# Altium PCB 400631.PcbDoc (part 7 of 8)
Units mm, origin at the board's own origin, x right, y up, seen from the top; angles counter-clockwise.
Board outline 136.53 x 63.5 mm, 4 copper layers (Top Layer, Mid-Layer 1, Mid-Layer 2, Bottom Layer), stack 1.52 mm thick; 366 components, 256 nets, 1485 pads, 1968 vias.
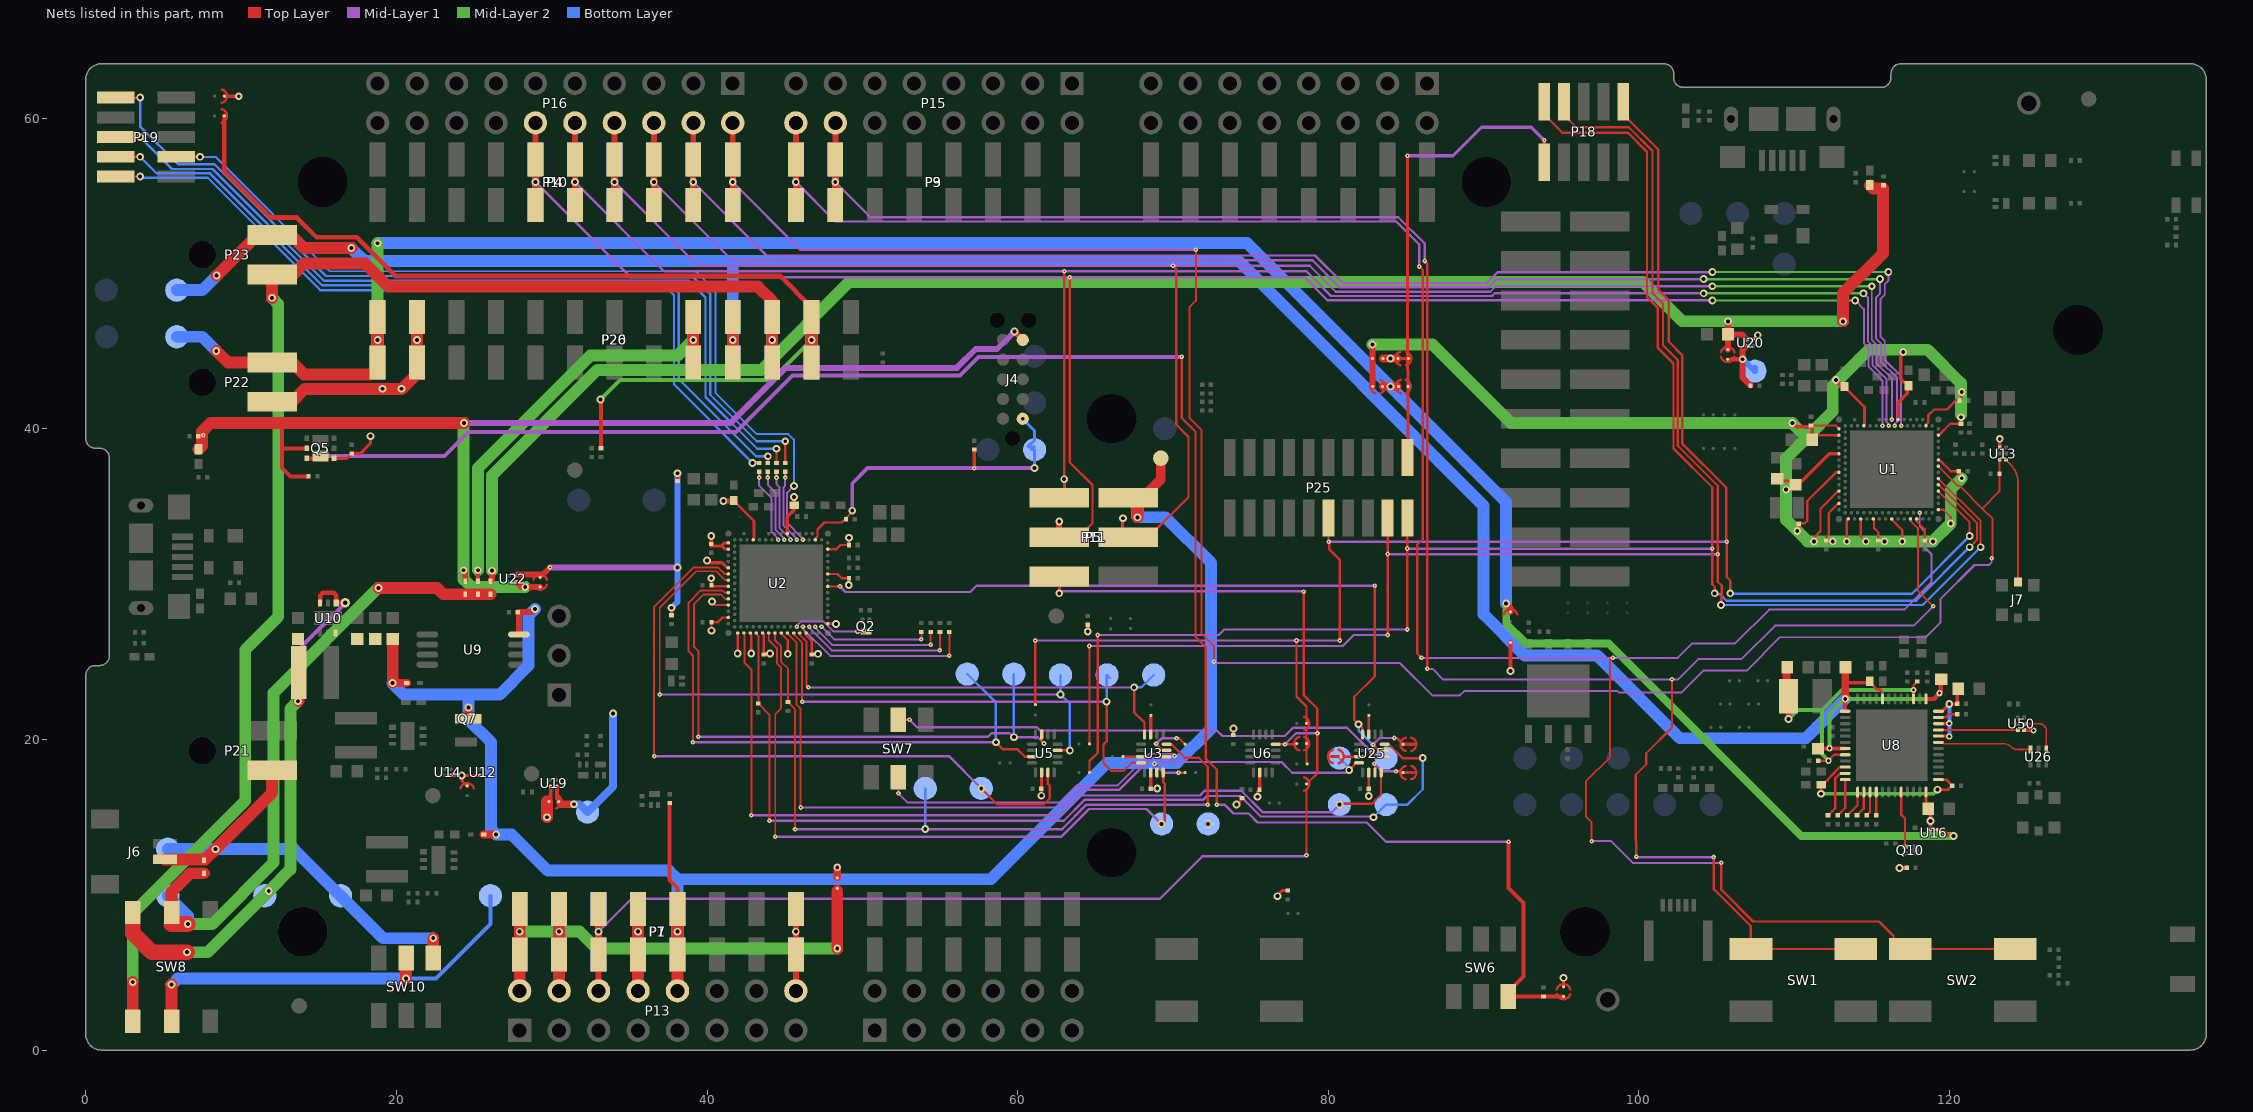
[diagram p7: the nets of this part, all layers, seen from the top]

## Via types
v1: diameter 0.5, hole 0.25, Top Layer to Bottom Layer, tented both sides, 1516 vias
v2: diameter 0.3, hole 0.1, Top Layer to Mid-Layer 1, tented top, 354 vias
v3: diameter 0.3, hole 0.1, Top Layer to Mid-Layer 1, tented both sides, 67 vias
v4: diameter 0.66, hole 0.33, Top Layer to Bottom Layer, tented both sides, 16 vias
v5: diameter 0.4, hole 0.2, Top Layer to Bottom Layer, tented both sides, 11 vias
v6: diameter 0.5, hole 0.3, Top Layer to Bottom Layer, tented both sides, 3 vias
v7: diameter 0.6, hole 0.3, Top Layer to Bottom Layer, tented both sides, 1 vias

## Nets (pads, with @x,y where several pads share a name; then routed paths per layer and width w, separated by ;. In a path a pad name is that pad's centre, name@x,y a point inside that pad or via, vN(x,y) a via of type N, cw(c..) or ccw(c..) an arc to the next point about the centre after c; other vN are vias at no path point) (continued)
P1.08: P3.7 P9.7 P15.14 SW1.2 U1.AL23 | length 147.3
  Top Layer w0.125: U1.AL23@117.478,34.189 117.478,34.071 117.953,33.596 117.953,29.571 v2(118.948,28.575)
  Top Layer w0.152: v2(86.208,50.8) 86.208,50.789 86.36,50.637 v2(86.36,24.536) ; v2(99.825,12.45) 99.822,12.453 99.822,13.461 99.796,13.486 99.796,17.719 100.47,18.393 100.47,19.105 102.125,20.76 v2(102.125,23.869) ; v2@104.825,12.4 104.825,10.35 107.206,7.969 SW1.2@107.206,6.502 SW1.2@113.956,6.502
  Top Layer w0.381: P3.7@48.26,54.415 v1(48.26,55.88) P3.7@48.26,57.345 P15.14@48.26,59.69
  Mid-Layer 1 w0.125: v2(86.36,24.536) 86.714,24.536 87.381,23.869 v2(102.125,23.869) 102.53,23.869 103.836,25.175 106.614,25.175 108.764,27.325 117.698,27.325 v2(118.948,28.575)
  Mid-Layer 1 w0.152: v1(48.26,55.88) 50.521,53.619 84.506,53.619 86.208,51.918 v2(86.208,50.8) ; v2(99.825,12.45) 99.852,12.423 v2(104.825,12.423)
  Bottom Layer w0.381: P9.7@48.26,54.415 v1(48.26,55.88) P9.7@48.26,57.345
P1.09: P3.8 P9.8 P15.16 SW2.2 U1.AK26 | length 160.6
  Top Layer w0.125: v2(96.95,13.45) 96.95,14.675 96.6,15.025 96.6,17.325 98.137,18.862 98.137,25.062 v2(98.325,25.25)
  Top Layer w0.152: v2(85.852,50.444) 86.083,50.214 86.083,32.889 85.725,32.532 85.725,25.527 v2(86.004,25.248) ; v2(105.3,12.05) 105.3,10.325 107.35,8.275 115.45,8.275 116.384,7.341 116.384,7.126 117.008,6.502 SW2.2@117.467,6.502 SW2.2@124.217,6.502
  Top Layer w0.381: P3.8@45.72,54.415 v1(45.72,55.88) P3.8@45.72,57.345 P15.16@45.72,59.69
  Mid-Layer 1 w0.125: v2@86.004,25.248 98.323,25.248 v2(98.325,25.25) 98.327,25.248 102.494,25.248 103.422,26.175 106.2,26.175 108.375,28.35 117.064,28.35 118.847,30.132 118.847,31.902 118.415,32.334 118.415,33.376 118.078,33.713 v2(118.078,34.589) ; v2(96.95,13.45) 98.2,13.45 99.6,12.05 v2(105.3,12.05)
  Mid-Layer 1 w0.152: v1(45.72,55.88) 48.26,53.34 84.379,53.34 85.852,51.867 v2(85.852,50.444)
  Bottom Layer w0.381: P9.8@45.72,54.415 v1(45.72,55.88) P9.8@45.72,57.345
P1.10: P4.1 P10.1 P16.2 R41.1 U1.R31 U13.6 | length 133.9
  Top Layer w0.125: v2@71.476,51.486 71.476,48.235 71.05,47.809 71.05,40.71 71.831,39.929 71.831,26.822 72.644,26.01 v3(72.644,24.994) ; U1.R31@119.278,37.589 120.496,36.371 120.566,36.3 120.675,36.3 122.113,34.863 ; v2(122.711,31.664) 122.745,31.697 122.745,31.819 122.75,31.825 122.75,34.225 122.113,34.863 ; U13.6@123.225,38 123.225,37.115 R41.1@123.21,37.1 123.21,35.96 122.113,34.863
  Top Layer w0.381: P4.1@41.656,54.415 P4.1@41.656,57.345 P16.2@41.656,59.69
  Mid-Layer 1 w0.125: v3(72.644,24.994) 72.691,24.994 72.768,24.917 84.608,24.917 86.69,22.835 88.476,22.835 88.754,23.112 98.615,23.112 98.702,23.025 102.746,23.025 104.147,24.425 106.925,24.425 109.075,26.575 118.475,26.575 119.425,27.525 119.425,29.05 121.601,31.226 122.531,31.226 122.711,31.406 v2(122.711,31.664)
  Mid-Layer 1 w0.152: v1(41.656,55.88) 46.025,51.511 v2@71.45,51.511
  Bottom Layer w0.381: P10.1@41.656,54.415 v1(41.656,55.88) P10.1@41.656,57.345
  other v2: 71.476,51.511
P1.11: P4.2 P10.2 P16.4 U1.B20 | length 99.5
  Top Layer w0.152: P4.2@39.116,53.823 P4.2@39.116,54.415
  Top Layer w0.381: P4.2@39.116,54.415 v1(39.116,55.88) P4.2@39.116,57.345 P16.4@39.116,59.69
  Mid-Layer 1 w0.125: v1@115.976,50.013 v1(116.053,50.089) 116.053,49.53 115.824,49.301 115.824,48.616 115.545,48.336 115.545,45.949 115.824,45.669 115.824,44.425 116.878,43.371 v2(116.878,40.189)
  Mid-Layer 1 w0.152: v1(39.116,55.88) 43.84,51.156 79.144,51.156 80.925,49.375 90.2,49.375 90.908,50.083 104.718,50.083 v1(104.724,50.089)
  Mid-Layer 2 w0.152: v1(104.724,50.089) v1(116.053,50.089)
  Bottom Layer w0.381: P10.2@39.116,54.415 v1(39.116,55.88) P10.2@39.116,57.345
P1.12: P4.3 P10.3 P16.6 U1.B18 | length 101.1
  Top Layer w0.152: P4.3@36.576,53.823 P4.3@36.576,54.415
  Top Layer w0.381: P4.3@36.576,54.415 v1(36.576,55.88) P4.3@36.576,57.345 P16.6@36.576,59.69
  Mid-Layer 1 w0.125: v1(115.519,49.632) 115.519,48.717 115.265,48.463 115.265,45.796 115.57,45.491 115.57,44.323 116.615,43.278 116.615,40.449 ; v2(116.478,40.189) v2@116.478,40.311 ; v2@116.478,40.311 116.615,40.449 ; v2@116.478,40.312 116.615,40.449
  Mid-Layer 1 w0.152: v1(36.576,55.88) 41.605,50.851 78.974,50.851 80.727,49.098 90.315,49.098 90.849,49.632 v1(104.165,49.632)
  Mid-Layer 2 w0.152: v1(104.165,49.632) v1(115.519,49.632)
  Bottom Layer w0.381: P10.3@36.576,54.415 v1(36.576,55.88) P10.3@36.576,57.345
P1.13: P4.4 P5.4 P10.4 P11.4 P16.8 U1.A17 | length 125
  Top Layer w0.152: v1(66.777,34.239) 66.777,33.363 P5.4@67.119,33.02 68.428,33.02 71,35.592 71,39.475 70.206,40.269 70.206,50.292 v2(70.002,50.495)
  Top Layer w0.381: P4.4@34.036,54.415 v1(34.036,55.88) P4.4@34.036,57.345 P16.8@34.036,59.69
  Mid-Layer 1 w0.125: v1(114.986,49.174) 114.986,45.72 115.291,45.415 115.291,44.221 116.278,43.234 v2(116.278,40.589)
  Mid-Layer 1 w0.152: v1(34.036,55.88) 39.421,50.495 v2(70.002,50.495) 78.805,50.495 80.48,48.82 90.43,48.82 90.784,49.174 v1(104.724,49.174)
  Mid-Layer 2 w0.152: v1(104.724,49.174) v1(114.986,49.174)
  Bottom Layer w0.152: v1(66.777,34.239) 66.777,33.198 66.954,33.02 P11.4@67.722,33.02
  Bottom Layer w0.381: P10.4@34.036,54.415 v1(34.036,55.88) P10.4@34.036,57.345
P1.14: P4.5 P5.1 P10.5 P11.1 P16.10 U1.B16 | length 121.1
  Top Layer w0.152: P5.1@62.674,35.56 62.992,35.878 v1(62.992,36.754) v2(62.992,50.14)
  Top Layer w0.381: P4.5@31.496,54.415 v1(31.496,55.88) P4.5@31.496,57.345 P16.10@31.496,59.69
  Mid-Layer 1 w0.125: v1(114.452,48.717) 114.732,48.438 114.732,45.618 115.037,45.314 115.037,44.094 115.928,43.203 115.928,40.439 ; v2(116.078,40.189) v2@116.078,40.289 ; 115.928,40.439 v2@116.078,40.289 ; 115.928,40.439 v2@116.078,40.289
  Mid-Layer 1 w0.152: v1(31.496,55.88) 37.236,50.14 v2(62.992,50.14) 78.585,50.14 80.182,48.543 90.545,48.543 90.719,48.717 v1(104.165,48.717)
  Mid-Layer 2 w0.152: v1(104.165,48.717) v1(114.452,48.717)
  Bottom Layer w0.152: P11.1@61.473,35.56 62.992,35.56 v1(62.992,36.754)
  Bottom Layer w0.381: P10.5@31.496,54.415 v1(31.496,55.88) P10.5@31.496,57.345
P1.15: P4.6 P5.3 P10.6 P11.3 P16.12 U1.B14 | length 126.7
  Top Layer w0.152: P5.3@62.674,33.02 63.932,33.02 64.821,33.909 64.821,36.373 63.348,37.846 v2(63.348,49.759)
  Top Layer w0.381: P4.6@28.956,54.415 P4.6@28.956,57.345 P16.12@28.956,59.69 ; P5.3@62.674,33.02 v1(62.674,34.023)
  Mid-Layer 1 w0.125: v1(113.919,48.26) 114.478,47.701 114.478,45.517 114.783,45.212 114.783,43.993 115.678,43.098 v2@115.678,40.214
  Mid-Layer 1 w0.152: v1(28.956,55.88) 35.077,49.759 v2(63.348,49.759) 78.461,49.759 79.959,48.26 v1(104.724,48.26)
  Mid-Layer 2 w0.125: v1(104.724,48.26) v1(113.919,48.26)
  Bottom Layer w0.381: P10.6@28.956,54.415 P10.6@28.956,57.345 ; P11.3@62.072,33.02 62.636,33.02 62.674,33.058 v1(62.674,34.023)
  other v2: 115.678,40.189
PALDO: C80.1 C81.2 U8.8 U8.10 U8.12 | length 6.1
  Top Layer w0.2: U8.8@119.278,20.209 119.953,20.209 v5(119.978,20.184) ; U8.10@119.278,21.009 119.849,21.009 119.924,21.084 v5@119.978,21.084 ; U8.12@119.278,21.809 119.532,21.809 119.978,22.255 v1(119.978,22.284) C80.1@120.493,22.284 ; C81.2@120.525,23.325 120.525,23.17 120.493,23.138 C80.1@120.493,22.284 ; C80.1@120.528,22.284 C80.1@120.493,22.284
  Bottom Layer w0.254: v5(119.978,20.184) 119.978,21.184 v1(119.978,22.284) v1@119.978,22.33
  other v5: 119.978,21.034
PWRIOVDD: C64.2 C71.1 U8.1 U8.34 | length 12.3
  Top Layer w0.152: v1(111.725,16.5) 111.725,17.081 C64.2@111.728,17.084 111.902,17.258 112.002,17.258 112.333,17.589 112.333,17.616 112.917,18.2 113.269,18.2 U8.34@113.278,18.209
  Top Layer w0.175: v1(119.211,16.761) 119.901,16.761 120.103,16.963 120.118,16.963 120.165,17.01 120.165,17.04 120.118,17.087 120.103,17.087 119.781,17.409 U8.1@119.278,17.409
  Mid-Layer 2 w0.254: v1(111.725,16.5) 118.95,16.5 v1@119.2,16.75
QSPI_CLK: R27.2 U8.35 | length 3.4
  Top Layer w0.152: R27.2@112.175,15.11 112.19,15.11 112.249,15.169 112.249,15.184 112.44,15.375 112.638,15.573 112.638,17.256 112.638,17.49 112.948,17.8 113.269,17.8 U8.35@113.278,17.809
QSPI_DATA0: R28.2 U8.37 | length 1.8
  Top Layer w0.152: R28.2@113.415,15.11 113.43,15.11 113.489,15.169 113.489,15.184 114.069,15.764 114.069,16.6 U8.37@114.078,16.609
QSPI_DATA1: R29.2 U8.38 | length 1.7
  Top Layer w0.152: R29.2@114.035,15.11 114.05,15.11 114.109,15.169 114.109,15.184 114.469,15.544 114.469,16.6 U8.38@114.478,16.609
QSPI_DATA2: R31.2 U8.39 | length 1.6
  Top Layer w0.152: R31.2@114.655,15.11 114.67,15.11 114.729,15.169 114.729,15.184 114.878,15.333 U8.39@114.878,16.609
QSPI_DATA3: R30.2 U8.40 | length 1.5
  Top Layer w0.152: R30.2@115.278,15.1 U8.40@115.278,16.609
QSPI_SS: R26.2 U8.36 | length 2.5
  Top Layer w0.152: R26.2@112.795,15.11 112.81,15.11 112.869,15.169 112.869,15.184 113.278,15.593 U8.36@113.278,17.409
R\E\S\E\T\: P18.10 P25.10 SB42.2 SB44.2 SB45.2 SB56.1 U1.AC31 | length 120.8
  Top Layer w0.125: U1.AC31@119.278,35.989 121.289,33.978 v1(121.289,33.086)
  Top Layer w0.152: SB56.1@61.138,22.233 v2(61.138,26.365) ; v2(77.953,26.365) 77.953,22.758 78.595,22.116 78.595,21.384 SB45.2@78.595,21.031 78.744,21.18 ; 78.595,20.678 78.595,20.08 SB44.2@78.595,19.727 78.595,19.374 78.595,18.474 SB42.2@78.646,18.423 ; P25.10@80.01,34.245 80.01,32.74 v2(80.025,32.725) 80.05,32.7 80.05,32.25 80.747,31.553 v3(80.747,26.365) ; P18.10@98.984,61.056 98.984,60.223 101.25,57.957 101.25,48.925 101.925,48.25 101.925,45.6 102.775,44.75 102.775,39.05 105.625,36.2 v2@105.625,32.75 ; v2(105.65,32.725) 105.65,30.45 105.875,30.225 v1(105.875,29.4)
  Mid-Layer 1 w0.152: v2(61.138,26.365) v2(77.953,26.365) v3(80.747,26.365) ; v2(80.025,32.725) v2(105.65,32.725)
  Bottom Layer w0.152: v1(105.875,29.4) 105.9,29.375 117.578,29.375 v1(121.289,33.086)
RESET_PIN: P1.3 P5.5 P7.3 P11.5 P13.6 SB43.2 SB44.1 U6.4 | length 95.7
  Top Layer w0.152: P1.3@33.02,9.085 P1.3@33.02,9.906 ; v1(62.674,29.401) P5.5@62.674,30.48 ; U6.4@76.61,19.691 76.616,19.685 v2(77.216,19.685) 77.791,19.685 77.797,19.691 77.934,19.691 SB44.1@77.97,19.727 ; v3(78.41,29.515) 78.41,22.86 79.299,21.971 v2(79.299,20.396) 79.299,17.823 78.744,17.268 SB43.2@78.595,17.12 ; v2(78.595,12.54) 78.595,16.766
  Top Layer w0.381: P13.6@33.02,3.81 P1.3@33.02,6.155 v1(33.02,7.62) P1.3@33.02,9.085
  Mid-Layer 1 w0.152: v1(33.02,7.62) 35.128,9.728 69.151,9.728 71.894,12.471 78.527,12.471 v2(78.595,12.54) ; v1(62.674,29.401) 62.801,29.527 64.389,29.527 78.397,29.527 v3(78.41,29.515) ; v2(77.216,19.685) 77.927,20.396 v2(79.299,20.396)
  Bottom Layer w0.152: v1(62.674,29.401) P11.5@62.674,30.594
  Bottom Layer w0.381: P7.3@33.02,6.155 v1(33.02,7.62) P7.3@33.02,9.085
RF: J7.1 U13.1 | length 8.1
  Top Layer w0.11: U13.1@123.625,38 123.905,37.72 cw(c122.71,36.525) 124.344,36.956 cw(c122.71,36.525) 124.4,36.525 J7.1@124.4,30.135
SW_CTRL0: Q10.1 U8.44 | length 3.6
  Top Layer w0.152: U8.44@116.878,16.609 116.878,15.172 117.125,14.925 Q10.1@117.125,13.1
SWD0_CLK: R15.1 U2.B18 | length 4.8
  Top Layer w0.152: v3(43.917,36.855) R15.1@43.917,37.231
  Mid-Layer 1 w0.125: v3(43.917,36.855) 43.917,36.383 44.413,35.886 44.413,33.486 44.714,33.186 44.716,33.186 44.914,32.988 44.914,32.986 44.976,32.923 v2(44.976,32.848)
SWD0_IO: R14.1 U2.B16 | length 4.9
  Top Layer w0.152: v3(43.358,36.855) R14.1@43.358,37.231
  Mid-Layer 1 w0.125: v3(43.358,36.855) 43.358,36.341 44.163,35.536 44.163,33.338 44.514,32.988 44.514,32.911 v2(44.576,32.848)
SWD0_RESET: R17.1 U2.B22 | length 4.8
  Top Layer w0.152: v3(45.034,36.855) R17.1@45.034,37.231
  Mid-Layer 1 w0.125: v3(45.034,36.855) 45.034,36.331 44.913,36.211 44.913,33.788 45.714,32.988 45.714,32.936 45.776,32.873 v2(45.776,32.848)
SWD0_RESET': P19.10 R17.2 | length 58.5
  Top Layer w0.152: P19.10@1.936,61.316 v1(3.505,61.316) ; R17.2@45.034,37.801 v1(45.034,39.192)
  Bottom Layer w0.152: v1(3.505,61.316) 3.505,59.462 5.944,57.023 8.289,57.023 15.477,49.835 39.04,49.835 40.208,48.667 40.208,42.189 43.205,39.192 v1(45.034,39.192)
SWD0_SEL: P19.3 U2.B24 | length 58.2
  Top Layer w0.152: P19.3@5.836,57.506 v1(7.366,57.506)
  Mid-Layer 1 w0.125: v1(45.593,36.316) 45.163,35.886 45.163,33.938 46.114,32.988 46.114,32.911 v2(46.176,32.848)
  Bottom Layer w0.125: v1(7.366,57.506) 8.357,57.506 15.723,50.14 39.26,50.14 40.538,48.862 40.538,42.316 43.205,39.649 45.237,39.649 45.593,39.294 v1(45.593,36.316)
SWD0_SWDCLK: P19.4 R15.2 | length 53.6
  Top Layer w0.152: P19.4@1.936,57.506 v1(3.505,57.506) ; R15.2@43.917,37.801 v1(43.917,38.227)
  Bottom Layer w0.152: v1(3.505,57.506) 4.572,56.439 8.011,56.439 15.224,49.225 37.667,49.225 38.176,48.716 38.176,43.205 43.155,38.227 v1(43.917,38.227)
SWD0_SWDIO: P19.2 R14.2 | length 52.4
  Top Layer w0.152: P19.2@1.936,56.236 v1(3.505,56.236) ; v1(42.932,37.801) R14.2@43.358,37.801
  Bottom Layer w0.152: v1(3.505,56.236) 3.581,56.159 7.859,56.159 15.098,48.92 37.541,48.92 37.871,48.59 37.871,42.861 v1(42.932,37.801)
SWD0_SWO: R16.1 U2.B20 | length 4.8
  Top Layer w0.152: v3(44.475,36.855) R16.1@44.475,37.231
  Mid-Layer 1 w0.125: v3(44.475,36.855) 44.475,36.424 44.663,36.236 44.663,33.638 45.314,32.988 45.314,32.936 45.376,32.873 v2(45.376,32.848)
SWD0_SWO': P19.6 R16.2 | length 55.5
  Top Layer w0.152: P19.6@1.936,58.776 v1(3.505,58.776) ; R16.2@44.475,37.801 v1(44.475,38.71)
  Bottom Layer w0.152: v1(3.505,58.776) 5.562,56.718 8.162,56.718 15.351,49.53 38.82,49.53 39.903,48.447 39.903,42.037 43.231,38.71 v1(44.475,38.71)
SWD1_CLK: R21.1 U2.AK28 | length 8.8
  Top Layer w0.125: v3@54.398,26.086 R21.1@54.398,26.918
  Mid-Layer 1 w0.125: v2(46.976,27.248) 46.976,27.201 47.038,27.138 47.038,27.108 48.061,26.086 v3(54.407,26.086)
SWD1_IO: R19.1 U2.AK30 | length 7.2
  Top Layer w0.125: v3(53.797,26.441) R19.1@53.797,26.918
  Mid-Layer 1 w0.125: v2(47.376,27.248) 48.183,26.441 50.418,26.441 v3(53.797,26.441)
SWD1_RESET: R23.1 U2.AK24 | length 11.8
  Top Layer w0.125: v3(55.601,25.375) R23.1@55.601,26.918
  Mid-Layer 1 w0.125: v2(46.176,27.248) 46.209,27.215 46.209,27.086 47.921,25.375 v3(55.601,25.375)
SWD1_SEL: Q2.3 U2.AK22 | length 4.9
  Top Layer w0.152: v3(49.688,26.944) 50.22,26.944 Q2.3@50.228,26.936
  Mid-Layer 1 w0.125: v2(45.776,27.248) 45.776,27.296 45.838,27.358 45.838,27.388 46.036,27.586 47.516,27.586 48.158,26.944 v3(49.688,26.944)
SWD1_SWO: R22.1 U2.AK26 | length 10.3
  Top Layer w0.125: v3@54.999,25.73 R22.1@54.999,26.918
  Mid-Layer 1 w0.125: v2(46.576,27.248) 46.576,27.171 48.017,25.73 v3(54.991,25.73)
SWD3_CLK: TP6.1 U2.R1 U5.3 | length 42.9
  Top Layer w0.125: v3(36.957,22.885) 36.957,28.473 39.307,30.823 40.597,30.823 41.172,30.248 U2.R1@41.376,30.248
  Top Layer w0.152: U5.3@62.572,19.291 v1(63.36,19.291)
  Mid-Layer 1 w0.152: v3@36.957,22.891 v1(62.758,22.891)
  Bottom Layer w0.152: TP6.1@62.758,24.144 v1(62.758,22.891) 63.36,22.289 v1(63.36,19.291)
SWD3_IO: TP5.1 U2.N1 U5.15 | length 44.2
  Top Layer w0.125: v3(36.601,18.923) 36.601,28.524 39.15,31.073 40.701,31.073 41.126,30.648 U2.N1@41.376,30.648
  Top Layer w0.152: v1(57.658,16.84) 58.674,15.824 61.697,15.824 62.078,16.205 62.078,17.015 61.947,17.145 U5.15@61.947,17.866
  Mid-Layer 1 w0.152: v3(36.601,18.923) 55.575,18.923 v1(57.658,16.84)
SWD3_RESET: TP7.1 U2.AA1 U5.7 | length 38.6
  Top Layer w0.125: v3(39.446,20.168) 39.446,25.679 39.167,25.959 39.167,28.727 39.775,29.336 40.888,29.336 41.176,29.048 U2.AA1@41.376,29.048
  Top Layer w0.152: U5.7@61.547,20.316 61.547,19.885 v3(61.697,19.736)
  Mid-Layer 1 w0.152: v3(39.446,20.168) 57.76,20.168 57.963,20.168 58.09,20.168 58.318,20.396 59.504,20.396 v1(59.758,20.142) 61.29,20.142 v3(61.697,19.736)
  Bottom Layer w0.152: v1(59.758,20.142) TP7.1@59.758,24.206
SWD3_SWO: TP8.1 U2.W1 U5.11 | length 39.4
  Top Layer w0.125: v3(39.091,19.812) 39.091,25.4 38.811,25.679 38.811,28.804 39.593,29.586 40.992,29.586 41.13,29.448 U2.W1@41.376,29.448
  Top Layer w0.152: v1(58.598,19.812) 59.055,19.355 59.995,19.355 60.458,18.891 U5.11@60.922,18.891
  Mid-Layer 1 w0.152: v3(39.091,19.812) v1(58.598,19.812)
  Bottom Layer w0.152: TP8.1@56.758,24.206 58.598,22.366 v1(58.598,19.812)
SWDCLK: P18.4 P25.4 SB55.1 U1.W31 | length 116.9
  Top Layer w0.125: U1.W31@119.278,36.789 122,34.066 v1(122,32.375)
  Top Layer w0.152: SB55.1@64.625,19.71 v2@64.625,26.01 ; v2@83.82,26.772 P25.4@83.82,34.245 ; P18.4@95.174,61.056 95.174,60.198 95.961,59.411 99.339,59.411 100.875,57.875 100.875,48.725 101.55,48.05 101.55,45.375 102.498,44.427 102.498,38.902 105.075,36.325 v2(105.075,31.925) 105.075,30.15 105.326,29.899 105.326,29.163 105.301,29.138 105.301,28.676 v1(105.275,28.65)
  Mid-Layer 1 w0.152: v2(64.618,26.01) 80.924,26.01 81.636,26.721 v2(83.82,26.721) ; v2(83.82,31.934) 83.829,31.925 v2(105.075,31.925)
  Bottom Layer w0.152: v1(105.275,28.65) 118.275,28.65 v1(122,32.375)
SWDIO: P18.2 P25.2 SB54.1 U1.AA31 | length 117.8
  Top Layer w0.125: U1.AA31@119.29,36.401 121.75,33.941 121.75,32.836 v1(121.289,32.375)
  Top Layer w0.152: SB54.1@64.625,17.856 64.625,18.6 65.151,19.126 v2(65.151,26.721) ; v2@85.09,27.127 v2(85.09,32.29) P25.2@85.09,34.245 ; P18.2@93.904,61.056 93.904,60.223 95.072,59.055 99.289,59.055 100.52,57.823 100.52,48.48 101.2,47.8 101.2,45.225 102.22,44.205 102.22,38.73 104.719,36.231 v2(104.719,32.281) 104.719,29.981 104.875,29.825 v1(104.875,29.4)
  Mid-Layer 1 w0.152: v2(65.151,26.721) 72.946,26.721 73.301,27.076 v2(85.09,27.076) ; v2(85.09,32.29) 85.099,32.281 v2(104.719,32.281)
  Bottom Layer w0.152: v1@104.875,29.35 105.219,29.35 105.642,28.927 117.841,28.927 v1(121.289,32.375)
SXLDO: C79.2 U8.11 | length 1.3
  Top Layer w0.152: U8.11@119.278,21.409 119.287,21.418 119.743,21.418 119.937,21.612 120.454,21.612 120.455,21.611 C79.2@120.51,21.611
TRX0: U26.1 U50.5 | length 2.9
  Top Layer w0.11: U50.5@124.8,21 125.775,21 cw(c125.775,20.55) 126.225,20.55 126.225,19.347 U26.1@126.218,19.347
TXRF0: U8.9 U50.3 | length 5.1
  Top Layer w0.11: U8.9@119.287,20.6 U50.3@124.4,20.6
TXRF1: U8.7 U26.3 | length 6.1
  Top Layer w0.11: U8.7@119.278,19.809 119.548,19.809 119.631,19.725 123.467,19.725 cw(c123.467,19.042) 123.95,19.525 ccw(c124.379,19.954) 124.379,19.347 U26.3@125.218,19.347
U\A\R\T\1\_\F\C\_\O\F\F\: SW7.5 U25.2 | length 32.7
  Top Layer w0.152: SW7.5@52.321,21.26 v3(53.035,21.26) ; v3(82.804,19.152) 83.064,18.891 U25.2@83.629,18.891
  Mid-Layer 1 w0.152: v3(53.035,21.26) 53.518,20.777 61.239,20.777 61.443,20.574 72.822,20.574 73.177,20.218 77.191,20.218 77.724,20.752 81.204,20.752 v3(82.804,19.152)
U\A\R\T\2\_\F\C\_\O\F\F\: SW7.2 U3.2 | length 20.9
  Top Layer w0.125: SW7.2@52.321,17.56 52.324,17.557 v3(52.324,16.535) ; U3.2@69.591,18.891 70.047,18.891 v3(70.098,18.942)
  Mid-Layer 1 w0.125: v3(52.324,16.535) 52.934,15.926 62.687,15.926 63.805,17.043 66.446,17.043 68.478,19.075 69.964,19.075 v3(70.098,18.942)
UART_1_CTS: SB27.2 U25.15 | length 2.7
  Top Layer w0.152: v3(82.956,18.44) 83.004,18.393 U25.15@83.004,17.866 ; v3(84.353,17.958) 84.645,17.958 84.655,17.948 84.747,17.856 SB27.2@84.82,17.856
  Mid-Layer 1 w0.152: v3(82.956,18.44) 83.439,17.958 v3(84.353,17.958)
UART_1_RTS: SB28.2 U25.3 | length 3.2
  Top Layer w0.152: v3(82.88,19.66) 83.249,19.291 U25.3@83.629,19.291 ; v3(84.252,20.091) 84.414,20.091 84.671,19.834 SB28.2@84.82,19.685
  Mid-Layer 1 w0.152: v3(82.88,19.66) 83.312,20.091 v3(84.252,20.091)
UART_1_RxD: SB29.2 U25.7 | length 1.2
  Top Layer w0.152: U25.7@82.604,20.316 SB29.2@82.604,21.542
UART_1_TxD: SB30.2 U25.11 | length 1.2
  Top Layer w0.152: SB30.2@80.822,18.891 80.996,18.891 U25.11@81.979,18.891 U25.11@81.976,18.894
UART_2_CTS: SB50.2 U3.15 | length 2.9
  Top Layer w0.152: v3(68.809,18.44) 68.966,18.283 U3.15@68.966,17.866 ; v3(70.358,17.856) SB50.2@70.782,17.856 SB50.2@70.772,17.866
  Mid-Layer 1 w0.152: v3(68.809,18.44) 69.393,17.856 v3(70.358,17.856)
UART_2_RTS: SB51.2 U3.3 | length 3
  Top Layer w0.152: v3(68.91,19.71) 69.329,19.291 U3.3@69.591,19.291 ; v3(70.231,20.066) 70.401,20.066 SB51.2@70.782,19.685
  Mid-Layer 1 w0.152: v3(68.91,19.71) 69.266,20.066 v3(70.231,20.066)
UART_2_RxD: SB52.2 U3.7 | length 1.2
  Top Layer w0.152: U3.7@68.566,20.316 U3.7@68.58,20.33
  Top Layer w0.203: U3.7@68.566,20.316 SB52.2@68.566,21.506
UART_2_TxD: SB53.2 U3.11 | length 1.2
  Top Layer w0.152: SB53.2@66.784,18.891 U3.11@67.941,18.891
USB_DETECT: Q5.3 R50.1 SB31.2 SW6.3 | length 122.9
  Top Layer w0.152: v2(70.561,44.628) 70.561,40.689 71.45,39.8 71.45,26.608 72.1,25.958 72.1,18.767 72.825,18.042 v3(72.825,15.8)
  Top Layer w0.254: Q5.3@14.238,38.085 14.742,38.085 14.91,38.252 v2(15.062,38.252) ; SW6.3@91.579,3.44 SW6.3@91.579,3.449 ; v2@91.592,13.4 91.592,10.439 92.558,9.474 92.558,4.724 91.579,3.746 SW6.3@91.579,3.449 ; SB31.2@95.148,3.447 95.146,3.449 94.794,3.449 R50.1@93.853,3.449 SW6.3@91.579,3.449
  Mid-Layer 1 w0.152: v3(72.825,15.8) 73.325,15.8 73.9,15.225 74.875,15.225 75.45,14.65 82.475,14.65 83.725,13.4 v2(91.6,13.4)
  Mid-Layer 1 w0.254: v2(15.062,38.252) 23.102,38.252 24.65,39.8 41.857,39.8 45.491,43.434 56.286,43.434 57.48,44.628 v2(70.561,44.628)
V5V: C59.2 C60.2 C65.2 C93.2 D4.2 D8.2 P1.5 P5.2 P7.5 P11.2 P13.10 Q7.2 R58.1 TP36.1 U9.8 U10.6 | length 123.1
  Top Layer w0.254: R58.1@37.592,15.895 37.592,10.933 38.1,10.425 P1.5@38.1,9.085
  Top Layer w0.381: C65.2@27.856,28.194 28.727,28.194 v1(28.931,28.397) ; U9.8@27.893,26.756 C65.2@27.893,28.157
  Top Layer w0.508: v1@19.663,23.625 D4.2@20.68,23.625 ; Q7.2@24.639,21.336 v1(24.639,22.046) ; D8.2@25.62,13.875 v1(26.425,13.875)
  Top Layer w0.635: P5.2@67.119,35.56 68.047,35.56 69.215,36.728 TP36.1@69.215,38.1
  Top Layer w0.762: v1@19.766,23.65 C93.2@19.766,26.462 ; P13.10@38.1,3.81 P1.5@38.1,6.155 v1(38.1,7.62) P1.5@38.1,9.085 ; P5.2@67.119,35.56 67.722,34.957 v1(67.722,34.296)
  Bottom Layer w0.508: 24.639,22.81 24.714,22.885
  Bottom Layer w0.762: v1(19.75,23.625) 20.49,22.885 24.714,22.885 26.645,22.885 28.499,24.74 28.499,27.965 v1(28.931,28.397) ; 24.639,22.81 v1(24.639,22.046) 24.639,21.261 26.1,19.8 26.1,14.2 v1(26.425,13.875) 27.425,13.875 29.75,11.55 37.548,11.55 38.1,10.998 ; P7.5@38.1,6.155 v1(38.1,7.62) P7.5@38.1,9.085 38.1,10.998 ; P11.2@67.722,35.56 v1(67.722,34.296) 69.514,34.296 72.45,31.36 72.45,20.675 70.257,18.482 65.757,18.482 58.273,10.998 38.1,10.998
VBAT: P20.11 P23.2 P26.11 SW8.3 | length 91.8
  Top Layer w0.762: SW8.3@3.027,2.559 v1(3.027,4.369) ; v1(12,48.425) P23.2@12,49.86 ; P23.2@12,49.93 P23.2@12,49.86 ; P20.11@44.196,44.255 v1(44.196,45.72) 44.196,48.235 43.281,49.15 19.475,49.15 17.995,50.63 16.332,50.63 16.322,50.64 14.91,50.64 14.064,50.64 13.284,49.86 P23.2@12,49.86
  Mid-Layer 2 w0.762: v1(3.027,4.369) 3.027,8.802 10.275,16.05 10.275,25.775 12.4,27.9 12.4,48.025 v1(12,48.425)
  Bottom Layer w0.762: P26.11@44.196,44.255 v1(44.196,45.72) P26.11@44.196,47.185
VBAT': SW8.2 SW10.2 TP30.1 | length 26.9
  Top Layer w0.762: 5.528,2.609 v1(5.528,4.216) ; v1@20.625,4.6 SW10.2@20.625,5.914
  Bottom Layer w0.254: v1(20.625,4.6) 22.55,4.6 26.06,8.11 TP30.1@26.06,9.931
  Bottom Layer w0.762: v1(5.528,4.216) 5.911,4.6 v1(20.625,4.6)
VBAT_MEAS: C77.1 C82.2 C83.2 C88.2 P20.10 P23.1 P26.10 TP25.1 U8.13 U8.20 U8.25 U8.31 | length 156.9
  Top Layer w0.152: v5@112.259,19.409 v5(112.275,19.425) ; U8.25@113.278,21.809 113.278,21.926
  Top Layer w0.2: 113.278,23.647 114.766,23.647 C88.2@114.853,23.734 114.853,23.684 115.328,23.209 115.491,23.209 115.678,23.022 U8.20@115.678,22.609 ; C83.2@119.425,23.8 119.425,23.825 C83.2@119.75,24.15
  Top Layer w0.254: C77.1@111.525,19.4 111.534,19.409 v5@112.259,19.409 ; v5@112.291,19.409 U8.31@113.278,19.409 ; 113.278,21.926 v1(113.278,22.609) ; U8.13@118.478,22.609 118.984,22.609 v5(119.35,22.975)
  Top Layer w0.3: v5(119.35,22.975) 119.35,23.002 119.425,23.077 C83.2@119.425,23.8 ; C83.2@119.45,23.875 C83.2@119.508,23.933
  Top Layer w0.508: C82.2@113.25,24.65 113.278,24.622 v1(113.278,22.609)
  Top Layer w0.762: v1(8.43,49.86) 10.97,52.4 13.284,52.4 14.054,51.63 16.332,51.63 v1(17.102,51.63) ; P20.10@41.656,44.255 v1(41.656,45.72) P20.10@41.656,47.185
  Mid-Layer 2 w0.25: v5(112.275,19.425) 112.275,21.65 113.234,22.609 118.984,22.609 v5(119.35,22.975)
  Bottom Layer w0.762: TP25.1@5.867,48.923 7.493,48.923 v1(8.43,49.86) ; v1(17.102,51.63) 17.932,50.8 41.656,50.8 ; P26.10@41.656,44.255 v1(41.656,45.72) P26.10@41.656,47.185 41.656,50.8 ; v1(113.278,22.609) 110.744,20.075 102.625,20.075 97.3,25.4 92.65,25.4 90,28.05 90,35.025 74.225,50.8 41.656,50.8
VBOOST_SRC: C57.2 L7.1 SW8.6 TP28.1 U10.1 U10.3 | length 36.6
  Top Layer w0.3: U10.3@15.091,28.787 15.091,29.261 15.267,29.436 15.965,29.436 16.141,29.261 U10.1@16.141,28.787 16.713,28.787 v7(16.717,28.79)
  Top Layer w0.762: L7.1@13.659,24.304 L7.1@13.666,24.312 ; v1@13.716,22.462 L7.1@13.716,24.304
  Top Layer w1.016: 3.028,8.109 3.028,7.529 4.258,6.299 v1(6.518,6.299)
  Mid-Layer 1 w0.254: v1(13.667,22.454) 13.667,25.74 v7(16.717,28.79)
  Mid-Layer 2 w0.762: v1(6.518,6.299) 7.849,6.299 v1(11.786,10.236) 13.175,11.626 13.175,21.962 v1(13.667,22.454)
VBOOST_SRC': D3.1 D5.1 D6.1 D7.1 SW8.5 TP32.1 | length 42.3
  Top Layer w0.762: SW8.5@5.528,8.859 5.528,10.178 6.73,11.38 D6.1@7.625,11.38 ; v1(18.85,29.75) 22.614,29.75 23.019,29.346 D3.1@24.435,29.346 D7.1@25.248,29.346 D5.1@26.06,29.346
  Top Layer w1.016: 5.528,8.109 v1(6.576,8.109)
  Mid-Layer 2 w0.762: v1(6.576,8.109) 8.134,8.109 12.1,12.075 12.1,23 v1(18.85,29.75)
  Bottom Layer w0.762: TP32.1@5.283,9.931 6.576,8.639 v1(6.576,8.109)
VBUS: C50.2 D3.2 FB2.2 J4.5 Q5.2 R52.1 SB48.2 U22.A2 | length 79.9
  Top Layer w0.254: 12.675,40.361 12.624,40.31 12.624,38.735 ; Q5.2@14.168,38.735 12.624,38.735 ; R52.1@14.345,36.932 13.183,36.932 12.624,37.49 12.624,38.735
  Top Layer w0.381: v1(24.333,30.886) 24.435,30.785 D3.2@24.435,30.186 ; 27.788,30.062 27.774,30.062 28.024,29.812 v1(28.296,29.812) 28.908,29.812 SB48.2@29.235,29.812 ; v1(59.792,46.253) J4.5@60.325,45.72
  Top Layer w0.762: FB2.2@7.264,38.677 7.493,38.905 7.493,39.821 8.032,40.361 12.675,40.361 24.336,40.361 v1(24.35,40.375)
  Mid-Layer 1 w0.381: v1(24.35,40.375) 24.364,40.361 41.504,40.361 45.06,43.917 56.083,43.917 57.302,45.136 58.674,45.136 v1(59.792,46.253)
  Mid-Layer 2 w0.762: v1(24.35,40.375) 24.333,40.358 24.333,30.302 24.823,29.812 v1(28.296,29.812)
  other v2: 7.569,39.573
VBUS_IMCU: R7.2 R10.1 SB48.1 U22.A1 | length 20.3
  Top Layer w0.203: R7.2@37.719,27.996 v1(37.719,28.473) ; R10.1@38.1,36.632 v1(38.1,37.135)
  Top Layer w0.381: U22.A1@27.762,30.604 29.179,30.604 29.342,30.604 29.435,30.604 v3(29.896,31.064)
  Mid-Layer 1 w0.381: v3(29.896,31.064) v1(38.1,31.064)
  Bottom Layer w0.381: v1(37.719,28.473) 38.1,28.854 v1(38.1,31.064) v1(38.1,37.135)
VBUS_NRF: R1.1 SB80.1 TP38.1 U20.A1 | length 4.9
  Top Layer w0.305: 105.943,44.468 106.068,44.468 v1@106.676,44.468
  Top Layer w0.381: U20.A1@106.909,45.288 106.676,45.056 v1(106.676,44.472) 106.676,44.468 106.676,43.28 R1.1@107.182,42.774
  Bottom Layer w0.381: v1(106.676,44.472) 107.434,43.713 TP38.1@107.467,43.713 TP38.1@107.467,43.909
VBUS_NRF': C48.2 C67.2 D5.2 FB1.2 SB80.2 U20.A2 | length 114.6
  Top Layer w0.254: FB1.2@114.852,55.684 114.864,55.671 C48.2@115.733,55.671
  Top Layer w0.381: D5.2@26.06,30.186 26.162,30.287 v1(26.162,30.861) ; SB80.2@105.715,45.093 105.729,45.107 105.729,45.267 C67.2@105.729,46.076 ; v1(105.74,46.914) 105.729,46.903 C67.2@105.729,46.076 ; U20.A2@106.896,45.809 106.64,46.065 105.74,46.065 C67.2@105.729,46.076
  Top Layer w0.762: v1(113.132,46.914) 113.132,48.707 115.7,51.275 115.7,55.475 115.06,55.475 FB1.2@114.864,55.671
  Mid-Layer 2 w0.762: v1(26.162,30.861) 26.162,37.008 32.944,43.79 43.51,43.79 49.171,49.45 100.25,49.45 102.786,46.914 v1(105.74,46.914) v1(113.132,46.914)
VCOM0_CTS: R9.1 TP55.1 U2.AL9 U25.4 | length 61.3
  Top Layer w0.125: U2.AL9@43.176,26.848 43.195,26.829 43.195,26.758 43.301,26.652 R9.1@43.301,22.311 44.018,21.593 v3(44.018,14.757)
  Top Layer w0.152: U25.4@83.629,19.691 83.89,19.691 84.785,18.796 v1(86.081,18.796)
  Mid-Layer 1 w0.152: v3(44.018,14.757) 62.967,14.757 64.313,16.104 71.933,16.104 72.187,16.358 74.33,16.358 75.651,15.037 82.855,15.037 v1(82.906,14.986)
  Bottom Layer w0.152: v1(82.906,14.986) TP55.1@83.718,15.799 85.09,15.799 86.081,16.789 v1(86.081,18.796)
VCOM0_RTS: TP54.1 U2.AL5 U25.16 | length 55.6
  Top Layer w0.125: U2.AL5@42.376,26.848 42.414,26.811 42.414,24.936 42.851,24.499 v3@42.851,15.114 ; 83.033,16.078 83.404,16.45 U25.16@83.404,17.866
  Top Layer w0.152: v1(80.732,15.799) 80.783,15.85 82.804,15.85 83.033,16.078 ; U25.16@83.404,17.866 U25.16@83.409,17.861
  Mid-Layer 1 w0.152: v3(42.85,15.113) 62.814,15.113 64.084,16.383 71.73,16.383 72.034,16.688 74.397,16.688 75.768,15.316 80.25,15.316 v1(80.732,15.799)
  Bottom Layer w0.152: TP54.1@80.718,15.799 v1(80.732,15.799)
VCOM0_RxD: TP57.1 U2.AL19 U25.12 | length 50.6
  Top Layer w0.125: U2.AL19@45.176,26.806 45.193,26.806 45.771,26.228 45.771,22.232 46.032,21.971 v3(46.032,15.614)
  Top Layer w0.15: U2.AL19@45.176,26.806 U2.AL19@45.176,26.848
  Top Layer w0.152: v1(81.343,18.034) 81.73,18.421 81.73,18.439 81.782,18.491 U25.12@81.979,18.491
  Mid-Layer 1 w0.152: v3(46.032,15.614) 62.408,15.614 62.858,15.614 64.008,16.764 66.548,16.764 68.58,18.796 69.063,18.796 69.317,18.542 76.987,18.542 77.673,17.856 81.166,17.856 v1(81.343,18.034) v1@81.331,18.034
  Bottom Layer w0.152: TP57.1@80.718,18.799 81.343,18.173 v1(81.343,18.034)
VCOM0_TxD: TP56.1 U2.U31 U25.8 | length 48.8
  Top Layer w0.125: U2.U31@47.795,29.829 U2.U31@47.776,29.848 v3(48.562,29.848)
  Top Layer w0.152: U25.8@82.204,20.316 82.204,20.712 81.95,20.966 v1(81.95,20.975) 81.675,21.25 81.675,22.739 82.989,24.054 v3(82.989,29.896)
  Mid-Layer 1 w0.152: v3(48.562,29.848) 48.92,29.489 56.947,29.489 57.353,29.896 v3(82.989,29.896)
  Bottom Layer w0.152: v1(81.95,20.975) 81.95,20.567 TP56.1@83.718,18.799
VCOM1_CTS: R13.1 TP1.1 U2.AL15 U3.4 | length 48.7
  Top Layer w0.125: U2.AL15@44.376,26.848 44.376,26.398 44.751,26.023 44.751,25.002 45.216,24.537 R13.1@45.216,22.398 45.669,21.945 v3(45.669,14.224)
  Top Layer w0.152: U3.4@69.597,19.685 U3.4@69.591,19.691 69.895,19.691 70.764,18.821 71.653,18.821 72.238,18.237 v3(72.238,15.799)
  Mid-Layer 1 w0.152: v3(45.669,14.224) v1(54.051,14.224) 62.865,14.224 64.44,15.799 v3(72.238,15.799)
  Bottom Layer w0.152: v1(54.051,14.224) TP1.1@54.051,16.84
VCOM1_RTS: TP3.1 U2.AL13 U3.16 | length 43
  Top Layer w0.125: U2.AL13@43.976,26.848 43.976,26.398 44.501,25.873 44.501,24.898 44.774,24.625 44.774,21.996 44.393,21.615 v3@44.393,13.741
  Top Layer w0.152: v1(69.266,14.554) 69.469,14.757 69.469,17.145 69.366,17.248 U3.16@69.366,17.866
  Mid-Layer 1 w0.152: v3@44.399,13.741 62.814,13.741 64.592,15.519 68.301,15.519 v1(69.266,14.554)
  other v3: 44.399,13.741
VCOM1_RxD: TP2.1 U2.AL21 U3.12 | length 33.1
  Top Layer w0.125: U2.AL21@45.576,26.824 45.576,26.777 45.627,26.727 46.126,26.227 v3(46.126,22.428)
  Top Layer w0.152: v1(65.726,22.428) 65.726,19.876 65.525,19.675 65.525,18.475 66.025,17.975 66.825,17.975 67.341,18.491 U3.12@67.941,18.491
  Mid-Layer 1 w0.152: v3(46.126,22.428) v1(65.726,22.428)
  Bottom Layer w0.152: v1(65.726,22.428) 65.726,24.112 TP2.1@65.758,24.144 TP2.1@65.933,23.969
VCOM1_TxD: TP4.1 U2.AL23 U3.8 | length 29.6
  Top Layer w0.125: U2.AL23@45.976,26.848 45.995,26.829 45.995,26.712 46.401,26.306 46.401,23.474 v3(46.528,23.347)
  Top Layer w0.152: v1(67.5,23.35) 67.5,21.75 68.166,21.084 U3.8@68.166,20.316
  Mid-Layer 1 w0.152: v3(46.528,23.347) 46.533,23.343 67.493,23.343 v1(67.5,23.35)
  Bottom Layer w0.152: v1(67.5,23.35) 67.964,23.35 TP4.1@68.758,24.144
VDBG: P18.1 P25.1 SB59.1 SB60.1 | length 30.8
  Top Layer w0.203: P25.1@85.09,38.145 85.137,38.192 SB60.1@85.137,42.725 85.137,43.752 85.098,43.792 v2(85.098,57.574) ; P18.1@93.904,57.156 v2(93.904,58.572)
  Mid-Layer 1 w0.203: v2(85.098,57.574) 88.029,57.574 89.865,59.411 93.066,59.411 v2(93.904,58.572)
VDD: C24.2 C41.2 C42.2 C45.2 P20.2 P22.2 P26.2 Q5.4 R47.2 R48.1 R49.1 R51.1 R57.2 R62.1 SB8.1 SB16.1 SB31.1 SB37.2 SB38.2 SB39.1 SB47.1 SB59.2 TP37.1 U3.14 U5.14 U6.14 U12.A2 U13.4 U14.A1 U19.A2 U20.B2 U25.14 U50.4 | length 37.8
  Top Layer w0.152: v1(82.601,16.358) 82.606,16.363 C24.2@82.606,16.815 82.606,17.864 U25.14@82.604,17.866
  Top Layer w0.2: SB47.1@8.923,61.408 v1(9.855,61.408) ; Q5.4@16.058,38.085 16.805,38.085 R51.1@17.12,38.399 17.674,38.399 18.339,39.064 v1(18.339,39.522) ; v1(61.524,16.377) C42.2@61.524,16.815 61.547,16.838 U5.14@61.547,17.866 ; v1(64.516,26.949) R57.2@64.516,27.376 ; U3.14@68.566,17.866 68.566,16.817 C41.2@68.569,16.815 68.986,16.815 v1(68.986,16.84) ; R48.1@73.889,20.275 v1(73.889,20.701) ; v1(74.092,15.799) 74.447,16.154 R49.1@74.447,16.225 ; v1(75.435,16.31) 75.435,16.614 75.585,16.764 U6.14@75.585,17.866 ; SB31.1@95.148,4.072 v1(95.148,4.648) ; U13.4@123.225,38.8 v1(123.225,39.35)
  Top Layer w0.203: U14.A1@23.517,17.682 24.275,17.682 24.387,17.682 24.562,17.682 24.737,17.682 U12.A2@25.378,17.682 ; v1(24.212,17.67) 24.23,17.652 24.23,17.318 SB39.1@24.555,16.993 ; v1@76.733,9.957 77.044,10.267 R47.2@77.394,10.267 ; U20.B2@107.363,45.742 v1(107.645,46.025)
  Top Layer w0.254: 29.941,15.992 U19.A2@29.941,16.95 ; v1@91.725,24.5 SB8.1@91.725,26.312 ; v1(116.775,11.725) R62.1@117.24,11.725 ; U50.4@124.8,20.6 v5@125.4,20.6
  Top Layer w0.508: SB38.2@48.387,11.125 v1(48.387,11.76) ; SB16.1@83.525,44.525 SB59.2@84.442,44.525
  Top Layer w0.762: P22.2@12.912,41.737 13.291,41.737 14.115,42.561 16.332,42.561 ; 16.357,42.55 20.35,42.55 21.207,43.407 21.207,44.126 P20.2@21.336,44.255 ; P20.2@21.336,45.162 P20.2@21.336,47.185 ; 29.679,15.992 29.693,15.979 v1(29.693,14.986)
  Bottom Layer w0.508: v1(72.263,14.554) TP37.1@72.266,14.554
  Bottom Layer w0.762: P26.2@21.336,44.255 v1(21.336,45.72) P26.2@21.336,47.185
  other v1: 76.733,9.906 91.725,24.4 19.1,42.575 20.325,42.575 84,44.525
  other v5: 125.4,20.575
VDD_BUCK: C75.2 C78.2 C85.2 L5.2 U8.15 U8.32 | length 18.7
  Top Layer w0.152: C75.2@111.538,18.634 112.191,18.634 v5(112.2,18.625) 112.2,18.65 112.559,19.009 U8.32@113.278,19.009 ; U8.15@117.678,22.609 v5(117.678,23.184) 117.678,23.487 117.838,23.648 117.838,23.663 117.897,23.721 C85.2@117.912,23.721
  Top Layer w0.4: v1(109.629,21.309) L5.2@109.629,22.784
  Top Layer w0.508: L5.2@109.496,22.917 L5.2@109.496,23.417 ; C78.2@109.496,24.529 L5.2@109.496,23.417 ; L5.2@109.629,23.284 L5.2@109.496,23.417
  Mid-Layer 2 w0.25: v1(109.629,21.309) 110.221,21.9 111.8,21.9 ; v5(112.2,18.625) 111.775,19.05 111.775,21.875 113.084,23.184 v5(117.678,23.184)
VDD_IMCU: C25.1 C30.1 C31.1 C32.1 C33.1 C34.1 C35.1 C36.1 C37.1 C38.2 J4.1 R6.2 SB37.1 TP20.1 TP35.1 U2.A19 U2.AC1 U2.AG1 U2.AJ31 U2.AL3 U2.AL7 U2.AL11 U2.AL17 U2.AL25 U2.B8 U2.B28 U2.C1 U2.E1 U2.E31 U2.L1 U2.N31 U2.U1 U19.A1 | length 59.5
  Top Layer w0.15: v1(40.284,27) 40.284,27.532 40.301,27.548 40.701,27.548 41.001,27.848 U2.AG1@41.376,27.848 ; C35.1@40.286,29.848 U2.U1@41.376,29.848 ; C35.1@40.286,29.923 v1@40.286,30.373 ; v1(40.326,28.877) 40.555,28.648 U2.AC1@41.376,28.648 ; v1(41.974,25.533) U2.AL3@41.976,26.848 ; U2.AL7@42.776,26.848 42.851,26.773 v1(42.851,25.533) ; U2.AL11@43.576,26.848 43.576,26.828 43.653,26.751 C37.1@43.653,25.458 ; C37.1@43.653,25.408 v1@44.001,25.408 ; U2.AL17@44.776,26.806 45.201,26.381 v1(45.201,25.508) ; U2.AL25@46.376,26.848 46.376,26.702 46.751,26.327 C30.1@46.751,25.458 46.801,25.408 v1@47.151,25.408 ; U2.B28@46.976,32.848 46.976,32.923 47.113,33.061 47.113,33.505 47.569,33.961 48.664,33.961 48.792,34.09 48.881,34.09 48.912,34.12 48.912,34.209 49.351,34.648 v1(49.351,34.723) ; U2.AJ31@47.776,27.448 v1@48.094,27.448 ; U2.N31@47.776,30.648 48.401,30.648 48.673,30.376 49.138,30.376 C31.1@49.141,30.373 49.124,30.356 v1(49.124,29.947)
  Top Layer w0.152: U2.E31@47.776,32.248 48.326,32.248 48.59,32.512 C32.1@49.141,32.512 v1(49.141,32.977)
  Top Layer w0.187: C38.2@41.826,35.428 41.826,35.256 43.019,34.063 43.019,32.891 U2.B8@42.976,32.848
  Top Layer w0.2: v1(40.001,31.523) 40.151,31.373 40.974,31.373 41.299,31.048 U2.L1@41.376,31.048 ; C34.1@40.276,32.458 40.886,32.458 ; U2.E1@41.376,32.248 41.371,32.253 41.146,32.253 40.939,32.461 41.126,32.648 U2.C1@41.376,32.648 ; v1@47.151,25.427 v1(47.151,25.508)
  Top Layer w0.203: v1(48.311,27.432) v1@48.393,27.514 ; v2(57.201,37.465) R6.2@57.201,38.653
  Top Layer w0.225: U2.A19@45.176,33.248 45.176,34.343 45.601,34.768 v1(45.601,35.598)
  Top Layer w0.25: C34.1@40.276,32.458 v1(40.276,33.086)
  Top Layer w0.254: 30.347,16.196 30.347,16.407 U19.A1@30.347,16.958
  Top Layer w0.3: v1(41.051,35.348) C38.2@41.676,35.348
  Top Layer w0.508: SB37.1@30.531,15.926 30.605,15.844 30.625,15.824 v1(31.445,15.824)
  Mid-Layer 1 w0.203: v1@61.081,37.459 v1(61.087,37.465)
  Mid-Layer 1 w0.254: v1(49.351,34.723) 49.351,36.473 50.343,37.465 v2(57.201,37.465) v1(61.087,37.465)
  Bottom Layer w0.203: v1(60.325,40.64) 61.087,39.878 61.087,39.268 60.681,38.862 60.712,38.831 61.087,38.831 60.912,38.656 TP20.1@61.087,38.656 v1(61.087,37.465)
  Bottom Layer w0.508: v1(31.445,15.824) 31.801,15.824 TP35.1@32.309,15.316 33.96,16.967 v1(33.96,21.666)
  other v1: 44.051,25.533 40.276,30.373
VDD_MEAS: P20.1 P22.1 P26.1 SB10.1 SB17.1 SB60.2 TP24.1 U16.A2 | length 151.2
  Top Layer w0.254: U16.A2@119.175,14.175 119.558,14.175 119.912,13.821 120.204,13.821 v1(120.25,13.775)
  Top Layer w0.4: v1(91.45,28.75) 91.45,28.741 91.725,28.466 91.725,28.387 SB10.1@91.725,28.212
  Top Layer w0.508: SB17.1@83.525,42.725 83.662,42.725 v1(84,42.725) 84.338,42.725 SB60.2@84.442,42.725
  Top Layer w0.762: v1(8.407,45.009) 9.146,44.27 P22.1@12,44.27 13.284,44.27 14.064,43.49 18.344,43.49 18.796,43.942 P20.1@18.796,44.255 v1(18.796,45.72) P20.1@18.796,47.185
  Mid-Layer 2 w0.5: v1(91.45,28.75) 91.45,27.45 92.725,26.175 98.05,26.175 110.45,13.775 v1(120.25,13.775)
  Mid-Layer 2 w0.762: v1(18.796,45.72) v1(18.796,51.943)
  Bottom Layer w0.762: TP24.1@5.867,45.923 7.493,45.923 v1(8.407,45.009) ; P26.1@18.796,44.255 v1(18.796,45.72) P26.1@18.796,47.185 ; v1@18.796,51.956 74.769,51.956 v1(84,42.725) 91.45,35.275 v1(91.45,28.75)
VDD_nRF53: C2.1 C8.1 C9.1 C10.1 C11.1 C12.1 C13.1 C14.1 C15.1 C16.2 C19.1 C20.1 L4.1 SB16.2 SB17.2 U1.A19 U1.AC1 U1.AG1 U1.AJ31 U1.AL3 U1.AL7 U1.AL11 U1.AL17 U1.AL25 U1.B8 U1.B28 U1.C1 U1.E1 U1.E31 U1.L1 U1.N31 U1.U1 | length 122.3
  Top Layer w0.15: C13.1@110.288,33.914 110.673,33.914 110.828,34.069 110.828,35.339 112.678,37.189 U1.U1@112.878,37.189 ; C12.1@111.063,40.204 C12.1@111.078,40.204 112.663,40.204 U1.C1@112.878,39.989 ; v1(111.26,32.735) 111.26,32.977 111.69,33.407 111.69,34.843 112.836,35.989 U1.AC1@112.878,35.989 ; C14.1@112.051,32.799 112.051,33.007 112.215,33.171 112.215,34.579 112.825,35.189 U1.AG1@112.878,35.189 ; C14.1@112.128,32.799 112.426,32.799 v1(112.476,32.749) ; v1(113.376,32.749) 113.376,34.087 U1.AL3@113.478,34.189 ; U1.AL7@114.278,34.189 114.278,33.077 v1(114.606,32.749) ; U1.AL11@115.078,34.189 115.128,34.139 115.128,33.614 115.404,33.338 C15.1@115.404,32.799 ; C15.1@115.404,32.749 v1(115.803,32.749) ; U1.AL17@116.278,34.147 116.953,33.472 v1(116.953,32.749) ; U1.AL25@117.878,34.189 117.878,34.043 118.403,33.518 C8.1@118.403,32.799 118.453,32.749 v1(118.928,32.749) ; U1.B28@118.478,40.189 118.478,40.264 118.615,40.401 118.615,40.846 119.008,41.239 119.827,41.239 120.452,41.864 120.643,41.864 120.753,41.974 v1@120.753,42.364 ; U1.AJ31@119.278,34.789 119.586,34.789 120.075,34.3 v1(120.075,33.9) ; U1.E31@119.278,39.589 119.32,39.589 120.045,40.314 120.718,40.314 C10.1@120.728,40.324 v1@120.728,40.789 ; 120.593,37.024 C9.1@120.593,37.264 ; U1.N31@119.355,37.989 120.08,37.264 ; U1.N31@119.355,37.989 119.278,37.989 U1.N31@119.355,37.989 ; U1.N31@119.355,37.989 120.08,37.264 ; 120.08,37.264 C9.1@120.593,37.264 ; 120.08,37.264 C9.1@120.593,37.264
  Top Layer w0.158: C20.1@111.153,39.289 111.153,39.293 111.449,39.589 U1.E1@112.878,39.589
  Top Layer w0.187: C16.2@113.328,42.714 113.328,42.597 114.521,41.404 114.521,40.232 U1.B8@114.478,40.189
  Top Layer w0.2: L4.1@108.678,36.639 C19.1@110.078,36.639 ; v1@109.475,36.025 109.532,36.082 109.621,36.082 109.652,36.114 109.778,36.114 109.927,36.264 109.927,36.389 C19.1@110.078,36.389 110.252,36.389 112.252,38.389 U1.L1@112.878,38.389
  Top Layer w0.203: v1(110.188,33.414) 110.288,33.514 C13.1@110.288,33.914
  Top Layer w0.225: U1.A19@116.678,40.589 116.678,41.684 117.278,42.284 C2.1@117.278,42.739 ; v1@117.015,44.914 116.865,44.764 116.865,43.226 C2.1@117.353,42.739
  Top Layer w0.25: v1(109.875,40.375) 109.896,40.375 110.146,40.125 110.984,40.125 C12.1@111.063,40.204 ; C20.1@111.153,39.293 C12.1@111.153,40.13 ; C16.2@113.19,42.781 C16.2@113.203,42.769
  Top Layer w0.305: v1@112.751,43.053 113.09,42.714 C16.2@113.228,42.714
  Top Layer w0.4: SB17.2@82.837,42.725 82.837,43.057 SB16.2@82.837,44.525 v1@82.837,45.462
  Mid-Layer 2 w0.762: v1(82.85,45.425) 86.7,45.425 91.75,40.375 v1(109.875,40.375) 109.875,40.366 110.677,39.564 110.928,39.564 ; v1@120.728,40.894 120.728,41.4 120.728,42.939 118.581,45.085 114.808,45.085 112.478,42.755 112.478,41.114 110.928,39.564 ; v1(120.777,36.814) 120.077,36.113 120.077,33.898 v1(118.928,32.749) v1(116.953,32.749) v1(115.803,32.749) v1(114.606,32.749) v1(113.376,32.749) v1(112.476,32.749) 110.853,32.749 109.475,34.126 109.475,38.111 110.928,39.564
  other v1: 109.475,36.075 120.728,40.738 120.778,42.364 112.674,43.129 117.015,44.939
VDD_nRF70: C68.1 U8.48 U16.A1 | length 2.6
  Top Layer w0.2: C68.1@118.478,15.525 118.478,16.584 U8.48@118.478,16.609
  Top Layer w0.254: U16.A1@118.775,14.175 C68.1@118.775,15.525
  Top Layer w0.305: C68.1@118.478,15.378 C68.1@118.625,15.525
  other v1: 118.763,14.738
VIN: P1.8 P7.8 P13.16 | length 8.2
  Top Layer w0.381: P13.16@45.72,3.81 P1.8@45.72,6.155 v1(45.72,7.62) P1.8@45.72,9.085
  Bottom Layer w0.381: P7.8@45.72,6.155 v1(45.72,7.62) P7.8@45.72,9.085
VIN3-5V: D7.2 P20.9 P26.9 | length 30.4
  Top Layer w0.305: D7.2@25.248,30.186 v1(25.248,30.886)
  Top Layer w0.762: P20.9@39.116,44.255 v1(39.116,45.72) P20.9@39.116,47.185
  Mid-Layer 2 w0.762: v1(25.248,30.886) 25.248,37.465 32.487,44.704 38.1,44.704 v1(39.116,45.72)
  Bottom Layer w0.762: P26.9@39.116,44.255 v1(39.116,45.72) P26.9@39.116,47.185
VIO: P1.1 P1.2 P1.4 P7.1 P7.2 P7.4 P13.2 P13.4 P13.8 SB38.1 | length 50.3
  Top Layer w0.762: P13.2@27.94,3.81 P1.1@27.94,6.155 P1.1@27.94,9.085 ; P13.4@30.48,3.81 v1(30.48,7.62) P1.2@30.48,9.085 ; P13.8@35.56,3.81 P1.4@35.56,6.155 P1.4@35.56,9.085 ; v1(48.387,6.528) 48.387,10.236
  Mid-Layer 2 w0.762: v1(27.94,7.62) v1(30.48,7.62) 31.801,7.62 32.893,6.528 35.56,6.528 ; v1(35.56,7.62) 35.56,6.528 ; v1(48.387,6.528) 35.56,6.528
  Bottom Layer w0.762: P7.1@27.94,6.155 P7.1@27.94,9.085 ; P7.2@30.48,6.155 P7.2@30.48,9.085 ; P7.4@35.56,6.155 P7.4@35.56,9.085
VIO_REF: P20.12 P26.12 R77.2 SB19.1 | length 69.8
  Top Layer w0.254: v1(33.147,41.885) 33.172,41.859 R77.2@33.172,38.741
  Top Layer w0.305: SB19.1@8.923,60.138 8.923,59.785 8.923,56.577 11.906,53.594 13.589,53.594 14.859,52.324 17.45,52.324 19.939,49.835 44.704,49.835 46.736,47.803 P20.12@46.736,47.185
  Top Layer w0.762: P20.12@46.736,44.255 v1(46.736,45.72) P20.12@46.736,47.185
  Mid-Layer 2 w0.254: v1(33.147,41.885) 34.392,43.129 44.145,43.129 v1(46.736,45.72)
  Bottom Layer w0.762: P26.12@46.736,44.255 v1(46.736,45.72) P26.12@46.736,47.185
VLi-Ion: D6.2 J6.2 P21.2 SW10.1 TP27.1 TP31.1 | length 31
  Top Layer w0.508: P21.2@12.751,18.009 P21.2@12.852,17.907
  Top Layer w0.762: J6.2@5.105,12.276 7.701,12.276 v1(8.357,12.932) 12,16.575 P21.2@12,18.009 ; SW10.1@22.375,5.914 v1@22.375,7.2
  Bottom Layer w0.762: TP31.1@5.283,12.932 v1(8.357,12.932) 13.408,12.932 19.14,7.2 v1(22.375,7.2)